# Altium PCB TestHBridge.PcbDoc
Units mil, origin at the board's own origin, x right, y up, seen from the top; angles counter-clockwise.
Board outline 6000 x 4000 mil, 2 copper layers (Top Layer, Bottom Layer); 23 components, 21 nets, 60 pads, 6 vias.
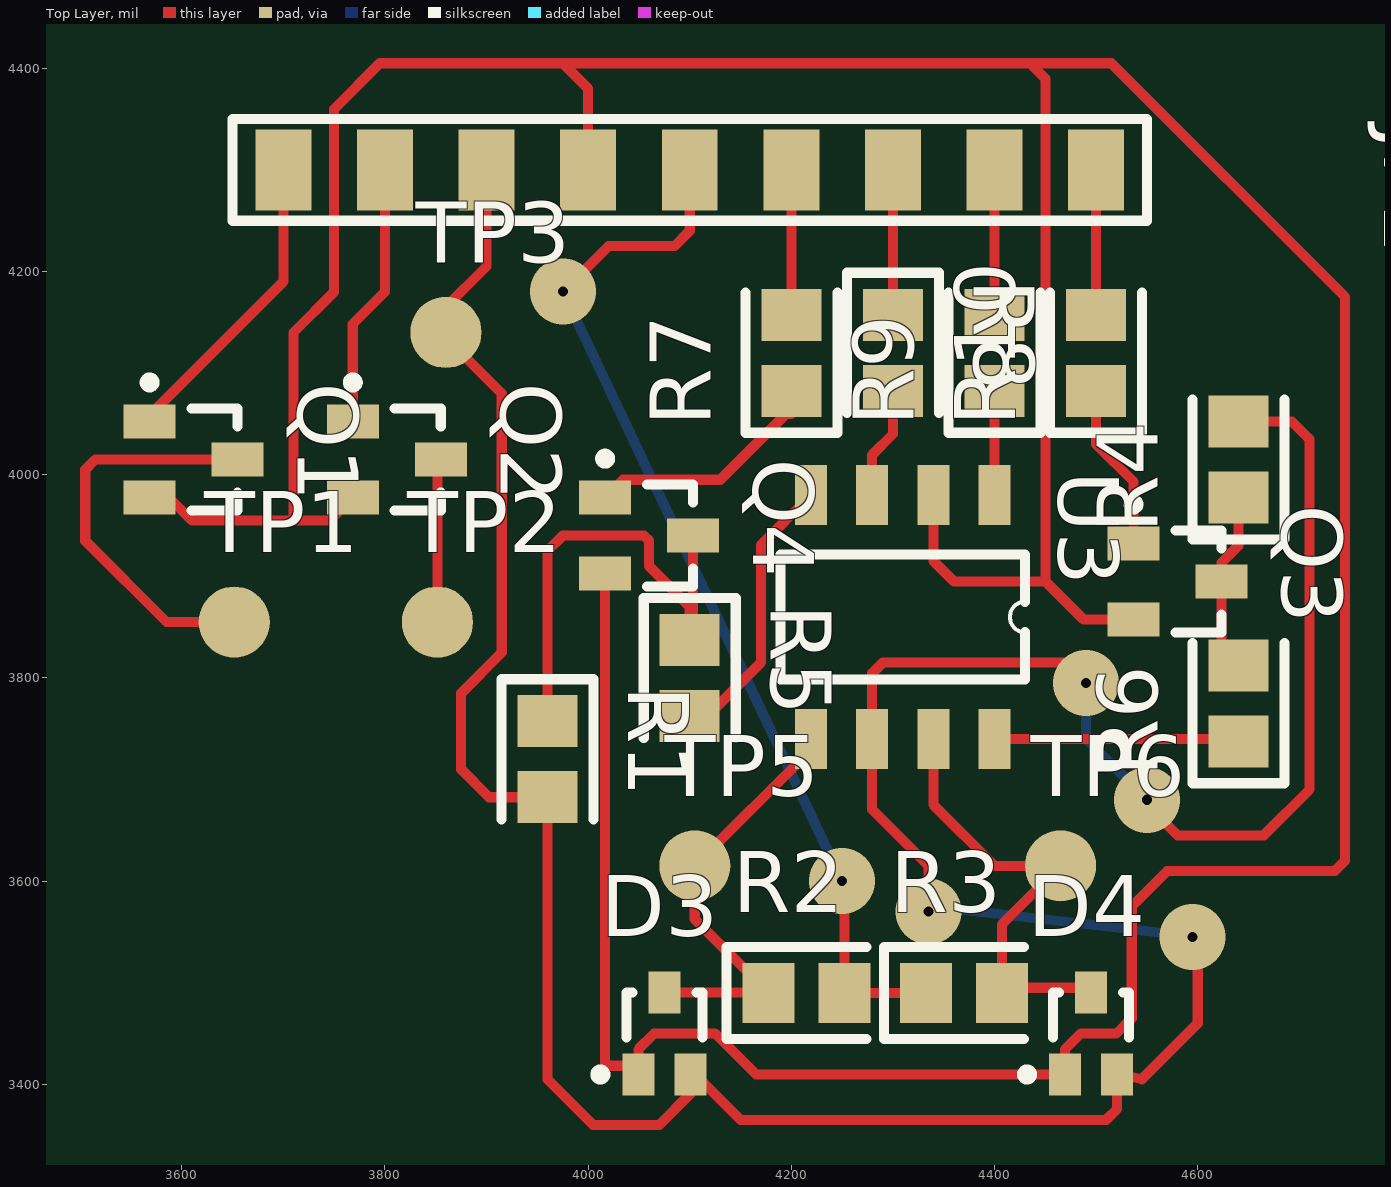
[diagram p0: Top Layer view]
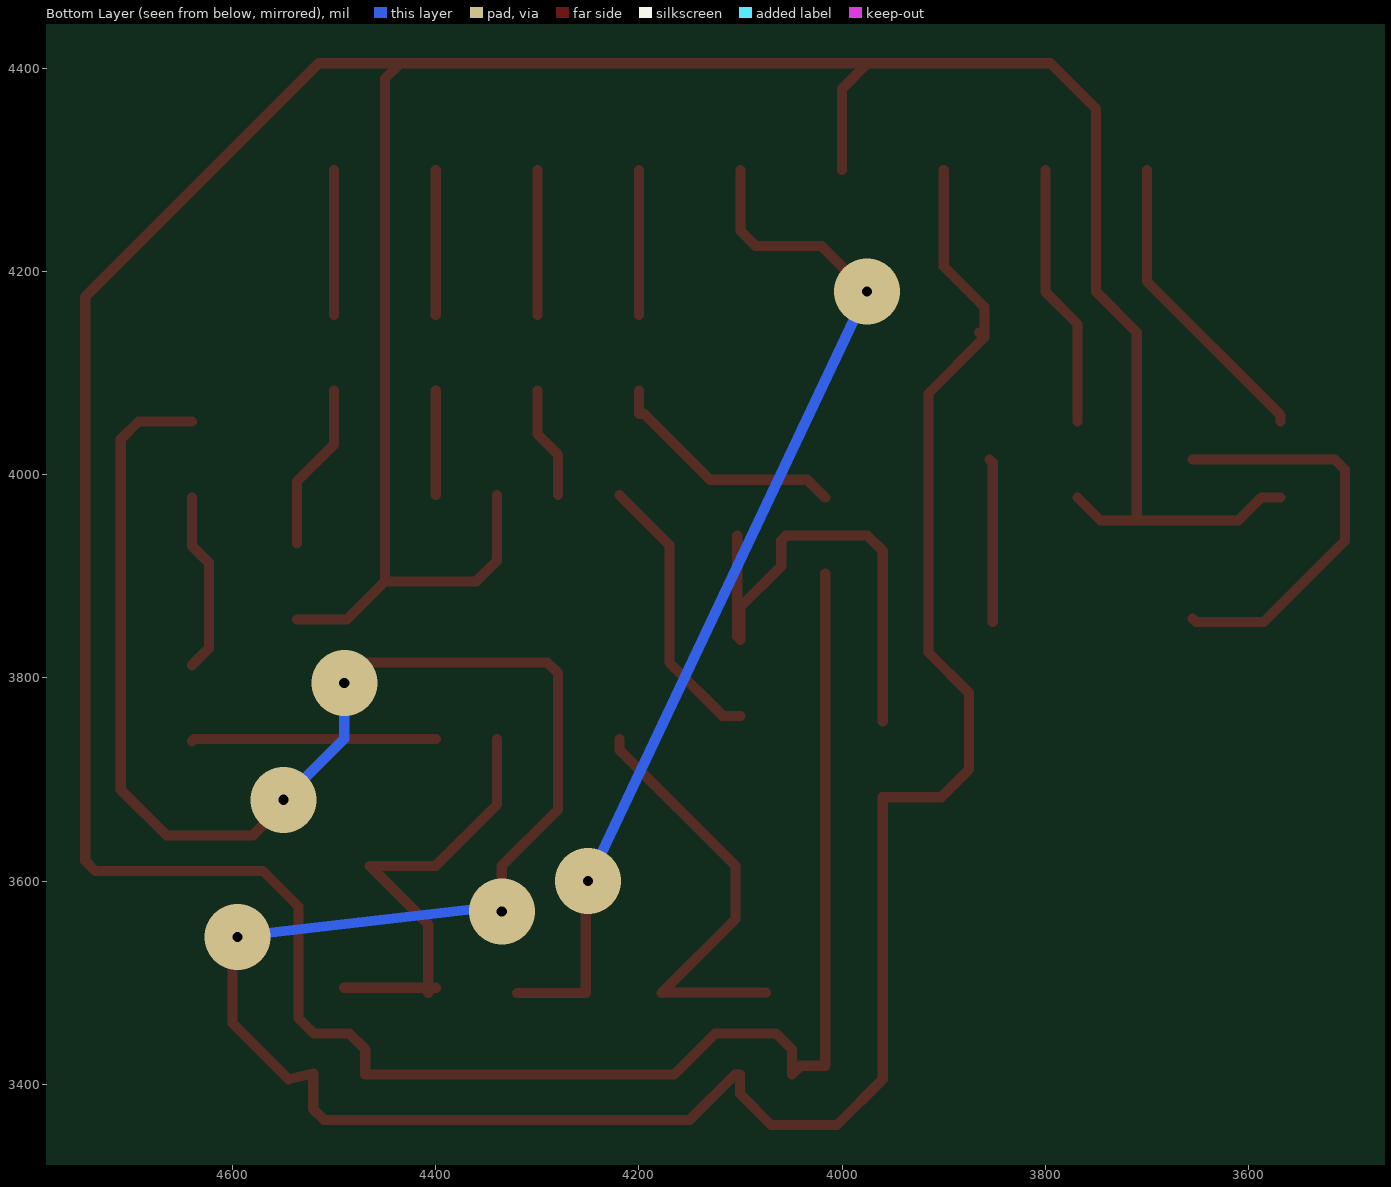
[diagram p1: Bottom Layer view, seen from below]

## Layer stack, top to bottom
Top Layer: signal copper 1.4
Dielectric: dielectric 12.6, FR-4, Dk 4.8
Bottom Layer: signal copper 1.4

## Board outline
1000,1000 7000,1000 7000,5000 1000,5000

## Design rules (kind name [scope] priority, off if disabled: settings)
Clearance [All] p1: gap=10
ComponentClearance [All] p1: gap=10 collisioncheckmode=0
PolygonConnect [All] p1: connectstyle=Relief reliefconductorwidth=10 reliefentries=4 polygonreliefangle="90 Angle"
RoutingLayers [All] p1: top layer=Horizontal bottom layer=Vertical
RoutingVias [All] p1: holewidth=28 width=50 viastyle="Through Hole" minholewidth=28 minwidth=50 maxholewidth=28 maxwidth=50
SolderMaskExpansion [All] p1: expansion=4
TestPointUsage [All] p1: valid=0 allowmultiple=FALSE
Testpoint [All] p1: side=15 testpointundercomponent=TRUE minsize=40 maxsize=100 preferedsize=60 minholesize=0 maxholesize=40 preferedholesize=32 testpointgrid=1 style=1023 order=1234567890
Width [All] p1: maxlimit=30 minlimit=10 preferedwidth=20 toplayer_prefwidth=10 minimp=50.000000 maximp=50.000000 favimp=50.000000
16 further rules are at their usual default settings.

## Components (designator, comment, footprint, x,y, rotation, side; value= is the part's Value field where it differs from the comment)
D3 "BAV99W" SOT-323 4075,3450 r0 top
D4 "BAV99W" SOT-323 4495,3450 r0 top
JP1 "Header 9" HDR1X9 3700,4300 r0 top
Q1 "UN2212" SO-G3 3611.69,4015 r270 top
Q2 "UN2212" SO-G3 3811.69,4015 r270 top
Q3 "MMBT100A" SO-G3 4580,3895 r270 top
Q4 "MMBT100A" SO-G3 4060,3940 r270 top
R1 "Res2" CC2012-0805 3960,3720 r270 top
R2 "Res2" CC2012-0805 4215,3490 r0 top
R3 "Res2" CC2012-0805 4370,3490 r0 top
R4 "Res2" CC2012-0805 4640,4015 r90 top
R5 "Res2" CC2012-0805 4100,3800 r270 top
R6 "Res2" CC2012-0805 4640,3775 r90 top
R7 "Res2" CC2012-0805 4200,4120 r90 top
R8 "Res2" CC2012-0805 4300,4120 r270 top
R9 "Res2" CC2012-0805 4400,4120 r90 top
R10 "Res2" CC2012-0805 4500,4120 r90 top
TP1 "Test Point" TestPoint 3651.69,3855 r0 top
TP2 "Test Point" TestPoint 3851.69,3855 r90 top
TP3 "Test Point" TestPoint 3860,4140 r90 top
TP5 "Test Point" TestPoint 4105,3615 r90 top
TP6 "Test Point" TestPoint 4465,3615 r90 top
U3 "ZHB6718" SOT223-8 4400,3980 r270 top

## Footprints (in the part's own frame and the unit in brackets; to place one, negate y for a bottom-side part, rotate by r counter-clockwise, add the part's x,y. Pads: shape width x height; smd on the part's side, far side on the other; paste and mask are expansions set on the pad)
CC2012-0805 [mm]
  rect 1.3x1.5 smd: 1(-0.95,0) 2(0.95,0)
  silkscreen extent -2,-1.15 1.5,1.15
HDR1X9 [mil] "Connector; Header; 9 Position"
  rect 55x80 smd: 1(0,0) 2(100,0) 3(200,0) 4(300,0) 5(400,0) 6(500,0) 7(600,0) 8(700,0) 9(800,0)
  silkscreen extent -50,-50 850,50
SO-G3 [mm]
  rect 0.85x1.3 smd: 1(-0.95,-1.1) 2(0.95,-1.1) 3(0,1.1)
  silkscreen extent -2.05,-1.22 1.28,1.1
SOT223-8 [mm]
  rect 1.5x0.8 smd: 1(0,0) 2(0,-1.53) 3(0,-3.06) 4(0,-4.59) 5(6.1,-4.59) 6(6.1,-3.06) 7(6.1,-1.53) 8(6.1,0)
  silkscreen extent 1.48,-5.35 4.62,0.76
SOT-323 [mm] "SOT-323/SC-70; 3 Leads; Body 2.2 x 2.2 mm, inc. leads (LxW max)"
  rect 0.8x1.05 smd: 1(-0.65,-1.025) 2(0.65,-1.025) 3(0,1.025)
  silkscreen extent -1.72,-1.15 0.95,1.03
TestPoint [mil]
  round 70 smd: 1(0,0)

## Part data
D3 D4: "Silicon Switching Diode Array for High-Speed Switching"
JP1: library part "Header 11", "Header, 11-Pin"
Q1 Q2: "Bias Resistor Transistor"
Q3 Q4: "General Purpose Amplifier NPN Silicon"
R1 R2 R3 R4 R5 R6 R7 R8 R9 R10: "Resistor"
TP1 TP2 TP3 TP5 TP6: library part TestPoint

## Via types
v1: diameter 65, hole 10, Top Layer to Bottom Layer, 6 vias

## Nets (pads, with @x,y where several pads share a name; then routed paths per layer and width w, separated by ;. In a path a pad name is that pad's centre, name@x,y a point inside that pad or via, vN(x,y) a via of type N, cw(c..) or ccw(c..) an arc to the next point about the centre after c; other vN are vias at no path point)
GND: D3.1 D4.1 JP1.4 Q1.2 Q2.2 Q3.2 Q4.2 U3.2 | length 4651.5
  Top Layer w10: Q1.2 3587.4,3977.6 3610,3955 3745.79,3955 Q2.2 ; 3710,3955 3710,4140 3750,4180 3750,4360 3795,4405 4515,4405 4745,4175 4745,3620 4735,3610 4570,3610 4535,3575 4535,3465 4520,3450 4485,3450 4469.41,3434.41 D4.1 4165.35,3409.65 4125,3450 4065,3450 4049.41,3434.41 D3.1 4040.75,3418.31 4016.69,3418.31 Q4.2 ; 3975,4405 4000,4380 JP1.4 ; U3.2 4339.76,3915.24 4360,3895 4450,3895 ; 4435,4405 4450,4390 4450,3895 ; Q3.2 4487.4,3857.6 4450,3895
NetD3_3: D3.3 R2.1 TP5.1 U3.5 | length 429.5
  Top Layer w10: D3.3 R2.1@4177.24,3490.35 ; R2.1 4105,3562.6 TP5.1 4219.29,3729.29 U3.5
NetD4_3: D4.3 R3.2 TP6.1 U3.7 | length 454
  Top Layer w10: U3.7 4339.76,3675.24 4400,3615 TP6.1 4407.4,3557.4 R3.2 ; R3.2@4400,3495 D4.3@4490.35,3495
NetJP1_1: JP1.1 Q1.1 | length 302.1
  Top Layer w10: Q1.1 3568.39,4058.39 3700,4190 JP1.1
NetJP1_2: JP1.2 Q2.1 | length 260.7
  Top Layer w10: Q2.1 3768.39,4148.39 3800,4180 JP1.2
NetJP1_5: JP1.5 R2.2 R3.1 | length 1030
  Top Layer w10: v1(3975.37,4180.37) 4020,4225 4085,4225 4100,4240 JP1.5 ; v1(4250,3600) 4252.4,3597.6 R2.2 R3.1@4320,3490
  Bottom Layer w10: v1(3975.37,4180.37) v1(4250,3600)
NetJP1_6: JP1.6 R7.2 | length 142.6
  Top Layer w10: R7.2 JP1.6
NetJP1_7: JP1.7 R8.1 | length 142.6
  Top Layer w10: R8.1 JP1.7
NetJP1_8: JP1.8 R9.2 | length 142.6
  Top Layer w10: R9.2 JP1.8
NetJP1_9: JP1.9 R10.2 | length 142.6
  Top Layer w10: R10.2 JP1.9
NetQ1_3: Q1.3 TP1.1 | length 408.6
  Top Layer w10: TP1.1@3655,3858.31 TP1.1 3585,3855 3505,3935 3505,4005 3515,4015 Q1.3
NetQ2_3: Q2.3 TP2.1 | length 161.4
  Top Layer w10: TP2.1 3851.69,4011.69 Q2.3
NetQ3_1: Q3.1 R10.1 | length 165.4
  Top Layer w10: R10.1 4500,4030 4536.69,3993.31 Q3.1
NetQ3_3: Q3.3 R4.1 R6.2 | length 179
  Top Layer w10: R6.2 4623.31,3829.09 4623.31,3913.31 4640,3930 R4.1
NetQ4_1: Q4.1 R7.1 | length 240.1
  Top Layer w10: Q4.1 4034.29,3995 4130,3995 4195,4060 4200,4060 R7.1
NetQ4_3: Q4.3 R1.1 R5.1 | length 494
  Top Layer w10: R1.1 3960,3925 3975,3940 4055,3940 4060,3935 4060,3910 4100,3870 R5.1 4103.31,3840.71 Q4.3
NetR5_2: R5.2 U3.4 | length 277.1
  Top Layer w10: R5.2 4117.6,3762.6 4170,3815 4170,3930.71 U3.4
NetR6_1: R6.1 U3.8 | length 240.9
  Top Layer w10: U3.8 4637.76,3739.84 R6.1
NetR8_2: R8.2 U3.3 | length 111.1
  Top Layer w10: U3.3 4279.53,4019.53 4300,4040 R8.2
NetR9_1: R9.1 U3.1 | length 102.6
  Top Layer w10: U3.1 R9.1
VDD: D3.2 D4.2 JP1.3 R1.2 R4.2 TP3.1 U3.6 | length 3388.1
  Top Layer w10: TP3.1 TP3.1@3865,4140 ; JP1.3 3900,4205 3860,4165 3860,4135 3915,4080 3915,3825 3875,3785 3875,3710 3902.4,3682.6 R1.2 3960,3405 4005,3360 4070,3360 4100.59,3390.59 D3.2 4105.35,3409.65 4150,3365 4510,3365 4520.59,3375.59 D4.2 ; v1(4335,3570) 4335,3615 4279.53,3670.47 4279.53,3804.53 4290,3815 4470,3815 v1(4490,3795) ; D4.2@4520.59,3410.59 4545,3405 4600,3460 v1@4600,3545 ; v1(4550,3680) 4550,3675 4580,3645 4665,3645 4710,3690 4710,4035 4692.6,4052.4 R4.2
  Bottom Layer w10: v1(4335,3570) 4340,3575 v1@4600,3545 ; v1(4490,3795) 4490,3740 v1(4550,3680)
  other v1: 4595,3545